# Altium PCB MB1183.PcbDoc
Units mm, origin at the board's own origin, x right, y up, seen from the top; angles counter-clockwise.
Board outline 22.5 x 40 mm, 2 copper layers (Top Layer, Bottom Layer), stack 1.571 mm thick; 27 components, 28 nets, 135 pads, 68 vias.
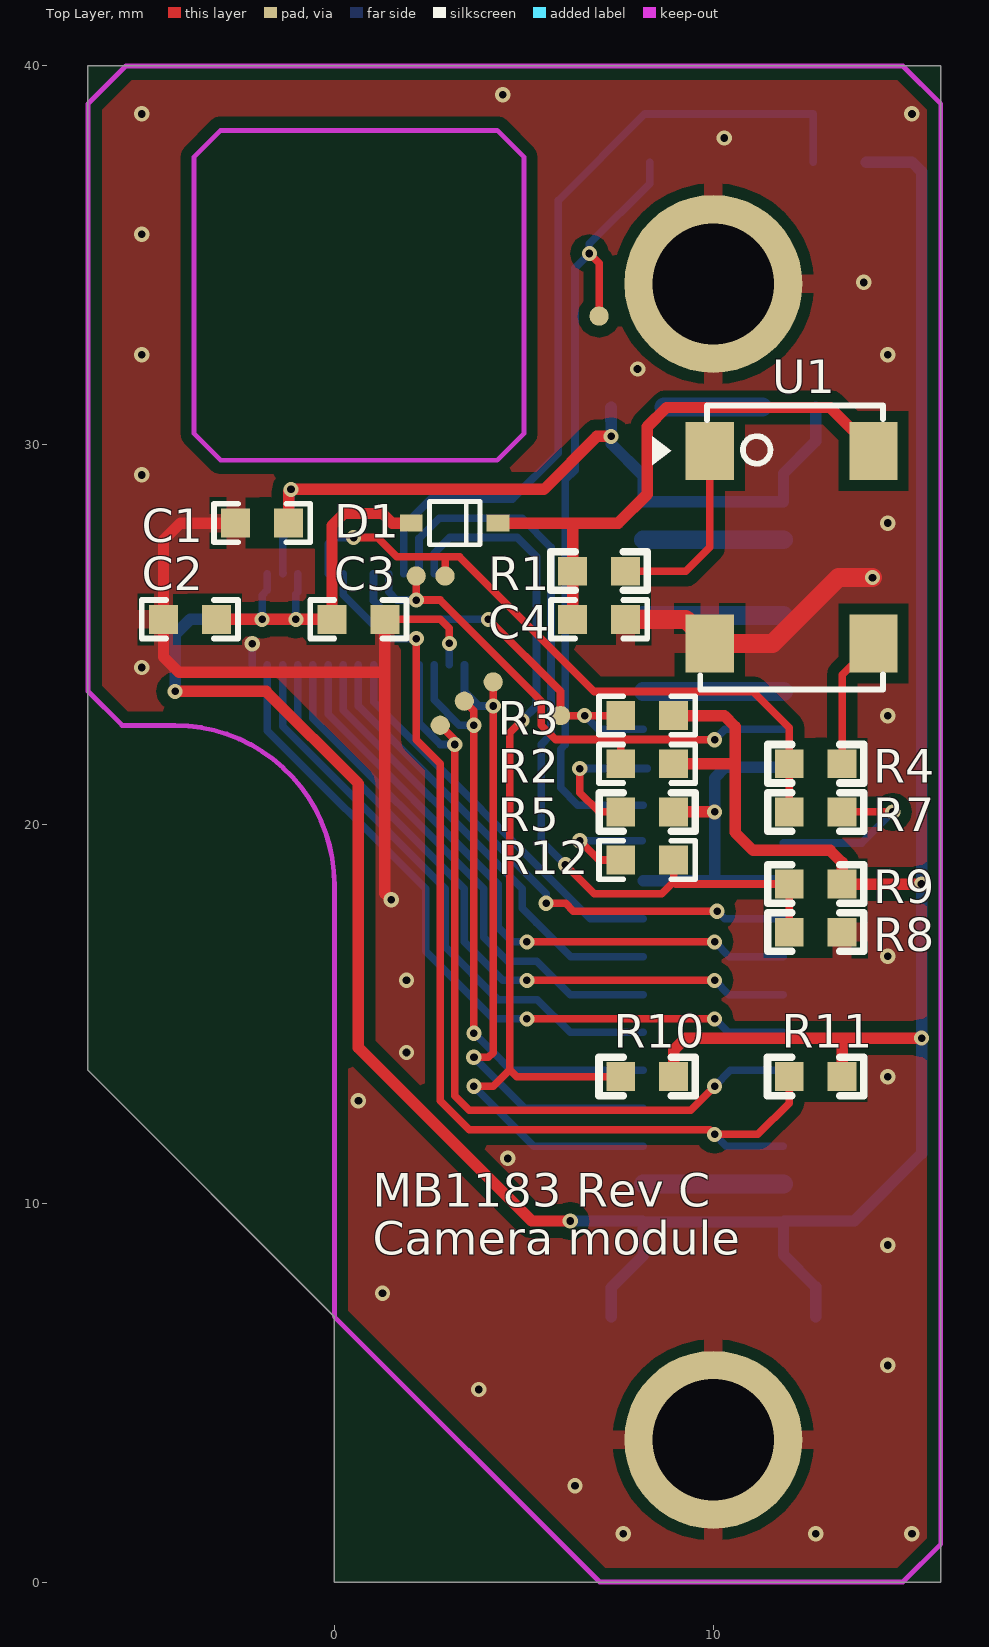
[diagram p0: Top Layer view]
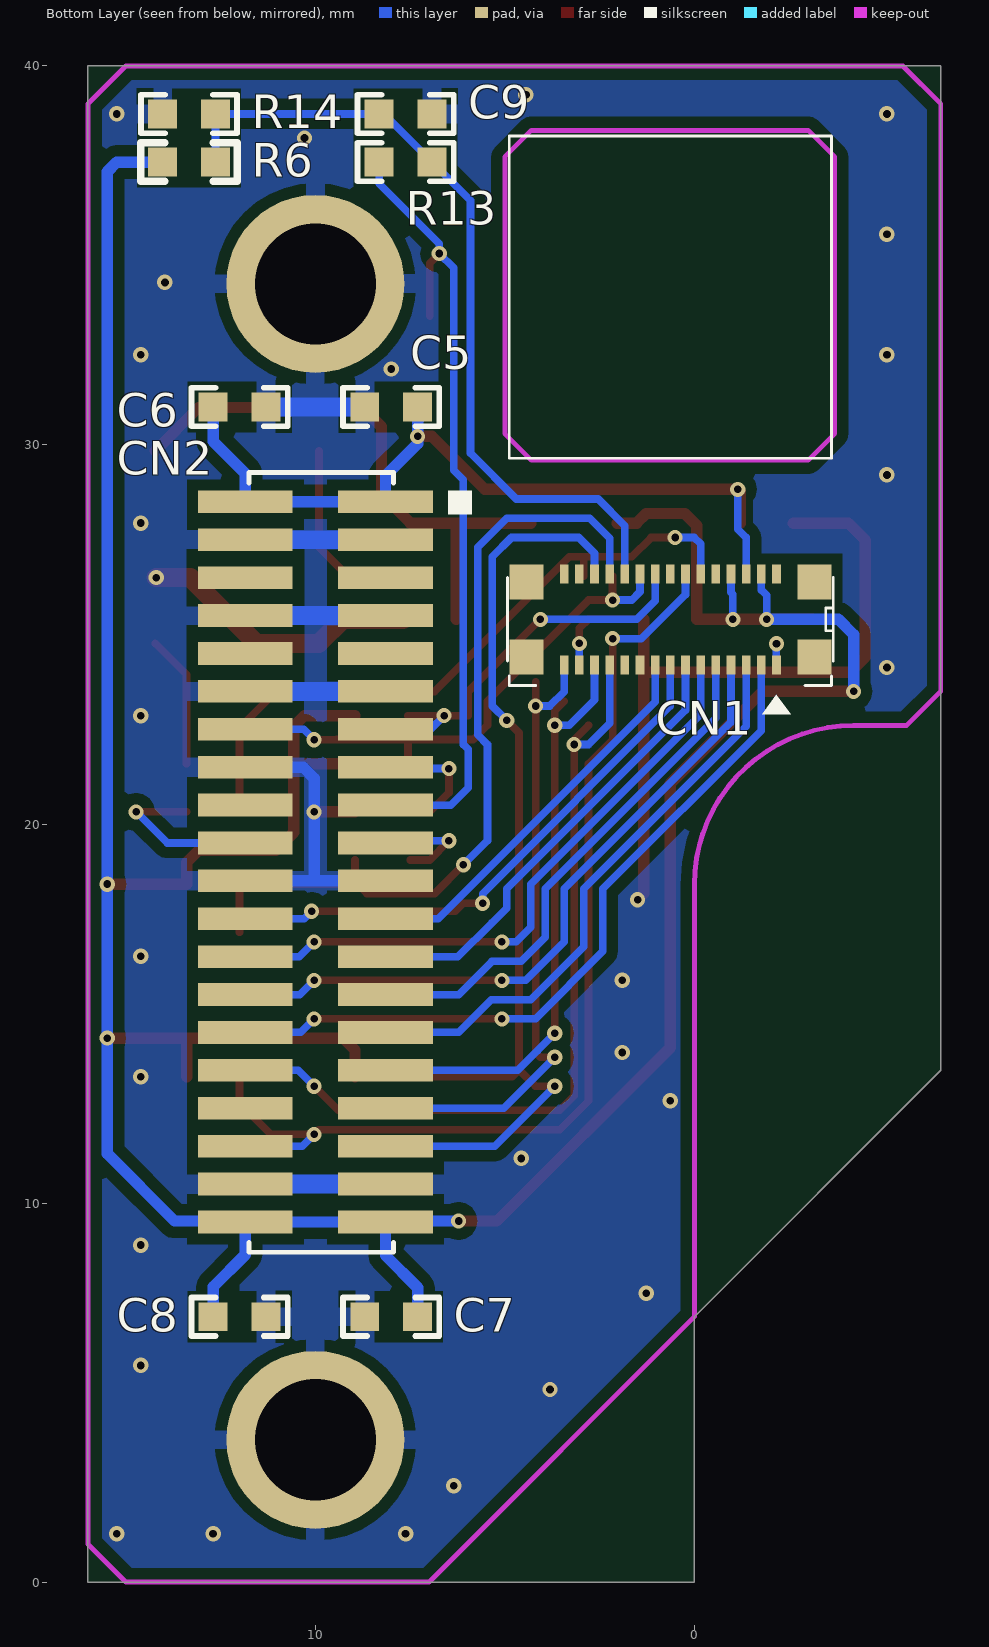
[diagram p1: Bottom Layer view, seen from below]

## Layer stack, top to bottom
Top Layer: signal copper 0.0356
Dielectric: core 1.5, FR-4, Dk 4.8
Bottom Layer: signal copper 0.0356

## Board outline
0,0 16,0 16,40 -6.5,40 -6.5,13.5 0,7 0,0

## Design rules (kind name [scope] priority, off if disabled: settings)
Clearance Clearance_1 [(InPoly)] p1: gap=0.3
Clearance [All] p2: gap=0.15
ComponentClearance [All] p1: gap=0.254 collisioncheckmode=3 verticalgap=0.254
HoleSize [All] p1: absolutevalues=TRUE maxlimit=3.81 minlimit=0.025 maxpercent=80.000 minpercent=20.000
PlaneClearance [All] p1: clearance=0.5
PolygonConnect PolygonConnect_2 [(InComponent('CN1'))] p1: connectstyle=NoConnect reliefconductorwidth=0.254 reliefentries=2 polygonreliefangle="90 Angle"
PolygonConnect PolygonConnect_1 [IsVia] p2: connectstyle=Direct reliefconductorwidth=0.508 reliefentries=4 polygonreliefangle="90 Angle"
PolygonConnect [All] p3: connectstyle=Relief reliefconductorwidth=0.5 reliefentries=4 polygonreliefangle="90 Angle"
RoutingLayers [All] p1: top layer_v5=FALSE bottom layer_v5=FALSE
RoutingVias [All] p1: holewidth=0.3 width=0.6 viastyle="Through Hole" minholewidth=0.2 minwidth=0.4 maxholewidth=0.7 maxwidth=1.3
SolderMaskExpansion [All] p1: expansion=0.102
TestPointUsage [All] p1: valid=0 allowmultiple=FALSE
Testpoint [(IsPad And (OnTopLayer Or OnBottomLayer))] p1: side=3 testpointundercomponent=TRUE minsize=1.016 maxsize=2.54 preferedsize=1.524 minholesize=0 maxholesize=1.016 preferedholesize=0.813 testpointgrid=0.025 style=297 order=0-112345678
Width [All] p1: maxlimit=2.54 minlimit=0.15 preferedwidth=0.254 toplayer_maxwidth=2.5 toplayer_prefwidth=0.2 bottomlayer_maxwidth=2.5 bottomlayer_prefwidth=0.2 minimp=50.000000 maximp=50.000000 favimp=50.000000
15 further rules are at their usual default settings.

## Classes and differential pairs
net class PAR_D[0..7]: PAR_D0 PAR_D1 PAR_D2 PAR_D3 PAR_D4 PAR_D5 PAR_D6 PAR_D7

## Components (designator, comment, footprint, x,y, rotation, side; value= is the part's Value field where it differs from the comment)
C1 "100nF" 0603C -1.905,27.94 r0 top (schematic designator C4)
C2 "100nF" 0603C -3.81,25.4 r0 top (schematic designator C3)
C3 "100nF" 0603C 0.635,25.4 r180 top (schematic designator C5)
C4 "100nF" 0603C 6.985,25.4 r180 top (schematic designator C8)
C5 "100nF" 0603C 8,31 r0 bottom (schematic designator C1)
C6 "100nF" 0603C 12,31 r0 bottom (schematic designator C2)
C7 "100nF" 0603C 12,7 r0 bottom
C8 "100nF" 0603C 8,7 r180 bottom (schematic designator C6)
C9 "[N/A]" 0603C 7.62,38.735 r0 bottom
CN1 "AXE530124" AXE530124 0.635,25.4 r0 bottom (schematic designator CN2)
CN2 "FTMH-120-03-L-DV-ES" FTMH-120-03-L-DV-ES 10,19 r270 bottom locked (schematic designator CN1)
D1 "BAT60JFILM" SOD-323 3.175,27.94 r180 top
R1 "10K" 0603R 6.985,26.67 r180 top (schematic designator R7)
R2 "[N/A]" 0603R 8.255,21.59 r0 top (schematic designator R8)
R3 "[N/A]" 0603R 8.255,22.86 r0 top (schematic designator R9)
R4 "0" 0603R 12.7,21.59 r0 top (schematic designator R6)
R5 "0" 0603R 8.255,20.32 r180 top (schematic designator R3)
R6 "[N/A]" 0603R 13.335,37.465 r0 bottom (schematic designator R2)
R7 "[N/A]" 0603R 12.7,20.32 r0 top (schematic designator R5)
R8 "[N/A]" 0603R 12.7,17.145 r0 top (schematic designator R4)
R9 "22K" 0603R 12.7,18.415 r0 top (schematic designator R1)
R10 "[N/A]" 0603R 8.255,13.335 r0 top
R11 "[N/A]" 0603R 12.7,13.335 r0 top
R12 "0" 0603R 8.255,19.05 r0 top
R13 "2K" 0603R 7.62,37.465 r0 bottom
R14 "10K" 0603R 13.335,38.735 r180 bottom
U1 "SM7745HEW-24.0M" XTAL_5X7 12.065,27.305 r270 top

## Footprints (in the part's own frame and the unit in brackets; to place one, negate y for a bottom-side part, rotate by r counter-clockwise, add the part's x,y. Pads: shape width x height; smd on the part's side, far side on the other; paste and mask are expansions set on the pad)
0603C [mil]
  rect 30x30 smd: 1(27.5,0) 2(-27.5,0)
  silkscreen extent -50,-20 50,20
0603R [mil]
  rect 30x30 smd: 1(27.5,0) 2(-27.5,0)
  silkscreen extent -50,-20 50,20
AXE530124 [mm]
  rect 0.9x0.92 smd: 0(-3.8,-0.99) 0(-3.8,0.99) 0(3.8,-0.99) 0(3.8,0.99)
  rect 0.23x0.5 smd: 1(-2.8,1.2) 2(-2.8,-1.2) 3(-2.4,1.2) 4(-2.4,-1.2) 5(-2,1.2) 6(-2,-1.2) 7(-1.6,1.2) 8(-1.6,-1.2) 9(-1.2,1.2) 10(-1.2,-1.2) 11(-0.8,1.2) 12(-0.8,-1.2) 13(-0.4,1.2) 14(-0.4,-1.2) 15(0,1.2) 16(0,-1.2) 17(0.4,1.2) 18(0.4,-1.2) 19(0.8,1.2) 20(0.8,-1.2) 21(1.2,1.2) 22(1.2,-1.2) 23(1.6,1.2) 24(1.6,-1.2) 25(2,1.2) 26(2,-1.2) 27(2.4,1.2) 28(2.4,-1.2) 29(2.8,1.2) 30(2.8,-1.2)
  silkscreen extent -4.3,-12.75 4.3,2.5
FTMH-120-03-L-DV-ES [mm]
  rect 0.6x2.5 smd: 1(-9.5,1.85) 2(-9.5,-1.85) 3(-8.5,1.85) 4(-8.5,-1.85) 5(-7.5,1.85) 6(-7.5,-1.85) 7(-6.5,1.85) 8(-6.5,-1.85) 9(-5.5,1.85) 10(-5.5,-1.85) 11(-4.5,1.85) 12(-4.5,-1.85) 13(-3.5,1.85) 14(-3.5,-1.85) 15(-2.5,1.85) 16(-2.5,-1.85) 17(-1.5,1.85) 18(-1.5,-1.85) 19(-0.5,1.85) 20(-0.5,-1.85) 21(0.5,1.85) 22(0.5,-1.85) 23(1.5,1.85) 24(1.5,-1.85) 25(2.5,1.85) 26(2.5,-1.85) 27(3.5,1.85) 28(3.5,-1.85) 29(4.5,1.85) 30(4.5,-1.85) 31(5.5,1.85) 32(5.5,-1.85) 33(6.5,1.85) 34(6.5,-1.85) 35(7.5,1.85) 36(7.5,-1.85) 37(8.5,1.85) 38(8.5,-1.85) 39(9.5,1.85) 40(9.5,-1.85)
  silkscreen extent -10.28,-1.75 10.3,4.14
SOD-323 [mm]
  rect 0.6x0.45 smd: 1(1.143,0) 2(-1.143,0)
  silkscreen extent -0.67,-0.57 0.67,0.57
XTAL_5X7 [mil]
  rect 60x50 smd: 1(-100,-85) 2(100,-85) 3(100,85) 4(-100,85)
  silkscreen extent -147,-145 148,95

## Part data
C1 C2 C3 C4 C5 C6 C7 C8 C9: library part Cap, "Capacitor"
CN1: library part U866_3M_FF, "CAMERA MODULE"
CN2: library part "Header 20X2", "20*2Pins, 1mm_SMT, male"
D1: library part Diode, "Default Diode"
R1 R3 R4 R5 R6 R7 R8 R9 R10 R11 R12 R13 R14: library part Res1, "Resistor"
R2: library part Res1, "Resistor 10K"
U1: library part SM7745HEV-50.0M

## Free pads (board coordinates)
  round 0.508 smd: 0(2.159,26.543) 0(2.794,22.606) 0(2.921,26.543) 0(3.429,23.241) 0(4.191,23.749) 0(5.969,22.86) 0(6.985,33.401)
  round 4.7 hole 3.2: 0(10,3.75) 0(10,34.25)

## Via types
v1: diameter 0.4, hole 0.2, Top Layer to Bottom Layer, tented both sides, 38 vias
v2: diameter 0.406, hole 0.203, Top Layer to Bottom Layer, tented both sides, 30 vias

## Nets (pads, with @x,y where several pads share a name; then routed paths per layer and width w, separated by ;. In a path a pad name is that pad's centre, name@x,y a point inside that pad or via, vN(x,y) a via of type N, cw(c..) or ccw(c..) an arc to the next point about the centre after c; other vN are vias at no path point)
+1V8: C1.1 C5.2 C6.1 CN1.6 CN2.1 CN2.2 | length 22.5
  Top Layer w0.3: C1.1 -1.207,28.765 v1(-1.143,28.829) 5.529,28.829 6.926,30.226 v1(7.302,30.226)
  Bottom Layer w0.2: CN1.6@-1.35,26.615 CN1.6 -1.365,27.559 -1.143,27.781 v1(-1.143,28.829)
  Bottom Layer w0.3: v1(7.302,30.226) 7.289,30.988 C5.2 7.302,30.036 8.15,29.188 CN2.1 CN2.2 11.85,29.249 12.699,30.098 C6.1
+2V8: C2.1 C3.1 C7.1 C8.1 CN1.4 CN1.8 CN2.39 CN2.40 D1.1 R2.1 R3.1 R6.1 R9.1 R10.1 R11.1 | length 98.3
  Top Layer w0.3: v1(-4.2,23.5) -1.8,23.5 0.635,21.065 0.635,14.097 5.207,9.525 v1(6.223,9.525) ; C2.1 v1(-1.905,25.4) ; v1@-2.032,25.4 v1(-1.905,25.4) ; D1.1 1.524,27.94 1.27,28.194 0.254,28.194 -0.063,27.877 -0.063,25.4 v1(-1.016,25.4) v1(-1.905,25.4) ; R10.1 8.954,14.034 9.271,14.351 v1(15.494,14.351) ; R2.1 10.484,21.59 10.573,21.5 ; R3.1 10.287,22.86 10.573,22.574 10.573,19.78 11.049,19.304 13.081,19.304 13.398,18.987 R9.1 v2(15.494,18.415) ; 13.335,14.351 13.399,14.287 R11.1
  Bottom Layer w0.2: v1(-1.905,25.4) -1.905,26.035 -1.765,26.175 CN1.4 ; v1(-1.016,25.4) -1.016,26.061 -0.965,26.112 CN1.8
  Bottom Layer w0.3: v1(-4.2,23.5) -4.2,25 -3.8,25.4 v1(-1.905,25.4) ; v1(6.223,9.525) 8.125,9.525 CN2.39 ; C8.1 7.302,7.765 8.15,8.614 CN2.39 ; C7.1 12.699,7.787 11.85,8.636 CN2.40 ; R6.1 15.24,37.465 15.494,37.211 15.494,11.303 13.716,9.525 11.875,9.525 CN2.40 ; CN2.39 CN2.40
CAMERA_CLK: CN1.12 pad.0@2.921,26.543 R4.2 R7.2 | length 17.8
  Top Layer w0.2: v1(0.508,27.559) 1.144,27.559 1.652,27.052 2.921,27.052 ; pad.0@2.921,26.543 2.921,27.052 ; R7.2 R4.2 12.002,22.542 11.049,23.495 6.858,23.495 3.301,27.052 2.921,27.052
  Bottom Layer w0.2: CN1.12 -0.165,27.393 0.001,27.559 v1(0.508,27.559)
CAMERA_RST: CN2.17 pad.0@6.985,33.401 R13.1 | length 21.6
  Top Layer w0.2: v1(6.731,35.052) 6.985,34.798 pad.0@6.985,33.401
  Bottom Layer w0.2: CN2.17 6.424,20.5 5.969,20.955 5.969,21.971 6.096,22.098 6.096,29.083 6.35,29.337 6.35,34.671 v1(6.731,35.052) 6.731,35.306 8.319,36.893 R13.1
CAMERA_RST_S5K: C9.1 CN1.22 R6.2 R13.2 R14.1 | length 21.7
  Bottom Layer w0.203: CN1.22 1.835,27.87 2.54,28.575 4.699,28.575 5.905,29.781 5.905,36.449 8.191,38.735 R14.1 R6.2
EXTCLK: CN2.20 R7.1 | length 4.6
  Top Layer w0.203: R7.1 v1(14.732,20.32)
  Bottom Layer w0.203: CN2.20 13.912,19.5 v1(14.732,20.32)
FLASH: CN1.14 CN2.36 R11.2 | length 28
  Top Layer w0.2: v1(2.159,24.892) 2.159,22.225 2.794,21.59 2.794,12.7 3.556,11.938 9.906,11.938 v1(10.033,11.811) 11.176,11.811 12.002,12.636 R11.2
  Bottom Layer w0.2: CN1.14 0.235,26.054 1.397,24.892 v1(2.159,24.892) ; v1(10.033,11.811) 10.344,11.5 CN2.36
GND: C1.2 C2.2 C3.2 C4.2 C5.1 C6.2 C7.2 C8.2 C9.2 CN1.1 CN1.27 CN2.3 CN2.4 CN2.7 CN2.8 CN2.11 CN2.12 CN2.16 CN2.21 CN2.22 CN2.37 CN2.38 pad.0@10,3.75 pad.0@10,34.25 R5.2 R8.1 R14.2 U1.2 | length 56.3
  Top Layer w0.2: C3.2@1.334,25.4 2.794,25.4 3.035,25.159 v1(3.035,24.765)
  Top Layer w0.3: C1.2 -4.06,27.94 -4.508,27.492 C2.2 -4.508,24.408 -4.1,24 1.334,24 ; C3.2@1.334,25.4 1.334,24 ; v1(1.5,18) 1.334,18.166 1.334,24 ; R5.2 v1(10.033,20.32)
  Top Layer w0.5: C4.2 9.271,25.4 U1.2 11.565,24.765 13.3,26.5 v1(14.2,26.5)
  Bottom Layer w0.2: CN1.1 v2(-2.165,24.759) ; CN1.27 v1(3.035,24.765)
  Bottom Layer w0.3: CN2.21 CN2.22 ; 10.033,18.5 10.033,21.209 10.324,21.5 CN2.16
  Bottom Layer w0.5: CN2.37 CN2.38 ; CN2.11 CN2.12 ; CN2.7 CN2.8 ; CN2.3 CN2.4 ; C5.1 C6.2
  other v2: 7.62,1.27 12.7,1.27 15.24,1.27 6.35,2.54 3.81,5.08 14.605,5.715 1.27,7.62 14.605,8.89 4.572,11.176 0.635,12.7 14.605,13.335 1.905,13.97 1.905,15.875 14.605,16.51 14.605,22.86 -5.08,24.13 14.605,27.94 -5.08,29.21 8.001,32.004 -5.08,32.385 14.605,32.385 13.97,34.29 -5.08,35.56 10.287,38.1 -5.08,38.735 15.24,38.735 4.445,39.243
NetC4_1: C4.1 D1.2 R1.1 U1.4 | length 15.2
  Top Layer w0.3: D1.2 7.493,27.94 8.255,28.702 8.255,30.48 8.763,30.988 13.081,30.988 U1.4 ; C4.1 6.286,27.94
NetCN2_15: CN2.15 R5.1 | length 3.7
  Top Layer w0.203: v1(6.477,21.463) 6.477,20.828 6.985,20.32 R5.1
  Bottom Layer w0.203: v1(6.477,21.463) CN2.15@8.255,21.463
NetCN2_19: CN2.19 R12.2 | length 2.9
  Top Layer w0.2: v1(6.477,19.558) 6.985,19.05 R12.2@7.493,19.05
  Bottom Layer w0.2: v1(6.477,19.558) CN2.19@8.128,19.558
NetR1_2: R1.2 U1.1 | length 5.9
  Top Layer w0.203: R1.2 9.271,26.67 9.906,27.305 9.906,29.019 ; 9.906,28.194 9.906,29.02 ; U1.1 9.906,29.02
NetR4_1: R4.1 U1.3 | length 3.5
  Top Layer w0.203: R4.1 13.399,23.94 U1.3
PAR_D0: CN1.17 CN2.23 | length 10.5
  Bottom Layer w0.2: CN1.17 1.035,23.222 6.757,17.5 CN2.23
PAR_D1: CN1.15 CN2.24 | length 14.8
  Top Layer w0.2: v1(5.588,17.907) 6.1,17.907 6.307,17.7 v1(10.1,17.7)
  Bottom Layer w0.2: CN1.15 0.635,23.114 5.588,18.161 v1(5.588,17.907) ; v1(10.1,17.7) 10.3,17.5 CN2.24
PAR_D2: CN1.13 CN2.25 | length 12.1
  Bottom Layer w0.2: CN1.13 0.235,23.006 4.953,18.288 4.953,17.78 5.334,17.399 5.34,17.399 6.239,16.5 CN2.25
PAR_D3: CN1.11 CN2.26 | length 16.6
  Top Layer w0.2: v1(5.08,16.891) v1(10.033,16.891)
  Bottom Layer w0.2: CN1.11 -0.165,22.898 4.318,18.415 4.318,17.272 4.699,16.891 v1(5.08,16.891) ; v1(10.033,16.891) 10.424,16.5 CN2.26
PAR_D4: CN1.9 CN2.27 | length 13.9
  Bottom Layer w0.2: CN1.9 -0.565,22.79 3.937,18.288 3.937,17.018 4.572,16.383 5.34,16.383 6.223,15.5 CN2.27
PAR_D5: CN1.7 CN2.28 | length 18.1
  Top Layer w0.2: v1(5.08,15.875) v1(10.033,15.875)
  Bottom Layer w0.2: CN1.7 -0.965,22.682 3.429,18.288 3.429,16.891 4.445,15.875 v1(5.08,15.875) ; v1(10.033,15.875) 10.408,15.5 CN2.28
PAR_D6: CN1.5 CN2.29 | length 15.4
  Bottom Layer w0.2: CN1.5 -1.365,22.574 2.921,18.288 2.921,16.764 4.318,15.367 5.356,15.367 6.223,14.5 CN2.29
PAR_D7: CN1.3 CN2.30 | length 19.6
  Top Layer w0.2: v1(5.08,14.859) v1(10.033,14.859)
  Bottom Layer w0.2: CN1.3 -1.765,22.466 2.413,18.288 2.413,16.637 4.191,14.859 v1(5.08,14.859) ; v1(10.033,14.859) 10.392,14.5 CN2.30
PAR_HSYNC: CN1.25 CN2.31 pad.0@3.429,23.241 | length 16
  Top Layer w0.2: pad.0@3.429,23.241 3.683,22.987 v1(3.683,22.606) v1(3.683,14.478)
  Bottom Layer w0.2: CN1.25 2.635,23.273 3.302,22.606 v1(3.683,22.606) ; v1(3.683,14.478) 3.689,14.478 4.136,14.031 4.136,14.025 4.661,13.5 CN2.31
PAR_PCLK: CN1.29 CN2.33 pad.0@4.191,23.749 | length 17
  Top Layer w0.2: v2(3.683,13.843) 4.064,13.843 4.191,13.97 v1(4.191,23.114) pad.0@4.191,23.749
  Bottom Layer w0.2: CN1.29 3.435,23.495 3.816,23.114 v1(4.191,23.114) ; v2(3.683,13.843) 5.026,12.5 CN2.33
PAR_VSYNC: CN1.23 CN2.32 pad.0@2.794,22.606 | length 21.9
  Top Layer w0.2: pad.0@2.794,22.606 3.175,22.225 v1(3.175,22.098) 3.175,12.827 3.556,12.446 9.398,12.446 v1(10.033,13.081)
  Bottom Layer w0.2: CN1.23 2.235,22.657 2.794,22.098 v1(3.175,22.098) ; v1(10.033,13.081) 10.452,13.5 CN2.32
SCL: CN1.18 CN2.13 pad.0@5.969,22.86 R3.2 | length 10.6
  Top Layer w0.203: v1(4.064,25.4) 5.969,23.495 5.969,22.86 v1(6.604,22.86) R3.2
  Bottom Layer w0.203: CN1.18 1.035,25.889 1.524,25.4 v1(4.064,25.4) ; v1(6.604,22.86) 6.964,22.5 CN2.13
SDA: CN1.20 CN2.14 pad.0@2.159,26.543 R2.2 | length 14.3
  Top Layer w0.203: pad.0@2.159,26.543 v1(2.159,25.908) 2.794,25.908 5.461,23.241 5.461,22.606 5.84,22.227 9.439,22.227 9.441,22.225 v1(10.033,22.225) ; 7.495,22.227 7.493,22.225 7.556,22.162 R2.2
  Bottom Layer w0.203: CN1.20 1.435,26.124 1.651,25.908 v1(2.159,25.908) ; v1(10.033,22.225) 10.308,22.5 CN2.14
SHUTTER: CN1.26 CN2.35 R10.2 | length 26.7
  Top Layer w0.203: v1(3.683,13.081) 4.191,13.081 4.628,13.518 ; v1(4.953,22.733) 4.628,22.408 4.628,13.518 ; R10.2 4.812,13.335 4.628,13.518
  Bottom Layer w0.203: CN1.26 2.635,27.146 3.048,27.559 4.826,27.559 5.334,27.051 5.334,23.114 v1(4.953,22.733) ; v1(3.683,13.081) 5.264,11.5 CN2.35
STANDBY: CN1.24 R8.2 R9.2 R12.1 | length 21.9
  Top Layer w0.203: v1(6.096,18.923) 6.858,18.161 8.636,18.161 8.954,18.479 ; R12.1 8.954,18.479 ; R8.2 R9.2 9.017,18.415 8.954,18.479
  Bottom Layer w0.203: CN1.24 2.235,27.537 2.765,28.067 4.953,28.067 5.715,27.305 5.715,22.352 5.461,22.098 5.461,19.558 v1(6.096,18.923)
pads on no net: CN1.0 CN1.2 CN1.10 CN1.16 CN1.19 CN1.21 CN1.28 CN1.30 CN2.5 CN2.6 CN2.9 CN2.10 CN2.18 CN2.34

## Polygon pours and split planes (outlines as drawn)
GND on Top Layer "Top Layer-No Net 1" (solid, remove dead copper, pour order 3): -5.867,40.816 -5.167,40.116 17.033,40.116 17.033,-0.984 17.833,-1.784 16.533,-0.484 -7.067,-0.484 -7.067,20.016 -8.667,21.616 -7.867,22.416 -7.867,40.716 -5.967,40.716
GND on Bottom Layer "Top Layer-No Net 1" (solid, remove dead copper, pour order 8): -7.977,40.878 -7.977,1.46 -4.777,-1.922 -4.477,-1.605 17.723,-1.605 17.723,40.35 18.123,40.772

## Keep-outs
Keep-Out Layer:
  lines w0.127: -6.5,23.5 -5.6,22.6 -4.2,22.6 cw(c-4.2,18.4) 0,18.4 0,7 7,0 15,0 16,1 16,39 15,40 1,40 -5.5,40 -6.5,39 -6.5,23.5 ; -3.7,30.3 -3.7,37.6 -3,38.3 4.3,38.3 5,37.6 5,30.3 4.3,29.6 -3,29.6 -3.7,30.3

## Silkscreen, mask and mechanical layers (free items; w line width, h text height)
Top Overlay:
  text "MB1183 Rev C" at 1.016,9.906 h0.89
  text "Camera module" at 1.016,8.636 h0.89
Mechanical 1:
  lines w0.127: 0,9 0,7 ; 0,7 0,18.4 ccw(c-4.2,18.4) -4.2,22.6 -5.6,22.6 -6.5,23.5 -6.5,39 -5.5,40 1,40 15,40 16,39 16,1 15,0 7,0 0,7 ; -3.7,30.3 -3,29.6 4.3,29.6 5,30.3 5,37.6 4.3,38.3 -3,38.3 -3.7,37.6 -3.7,30.3
  text "MB1183" at -5.715,40.64 h1.52
Drill Drawing:
  lines w0.051: 26.024,9.359 53.476,9.359 ; 26.024,10.347 53.476,10.347 ; 24.5,3.33 ccw(c24.83,3.33) 24.83,3 54.67,3 ccw(c54.67,3.33) 55,3.33 55,12.17 ccw(c54.67,12.17) 54.67,12.5 24.83,12.5 ccw(c24.83,12.17) 24.5,12.17 24.5,3.33
  text ".legend" at 19.5,39 h0.89
  text "Layer Stack Up Detail for: MB1183.PcbDoc" at 26.024,10.92 h0.66
  text "Layer" at 26.024,9.978 h0.23
  text "Gerber" at 32.02,9.978 h0.23
  text "Copper" at 34.791,9.978 h0.23
  text "Dielectric" at 37.936,9.978 h0.23
  text "Dielectric" at 41.24,9.978 h0.23
  text "Dielectric" at 45.585,9.978 h0.23
  text "Dielectric" at 48.89,9.978 h0.23
  text "Name" at 26.024,9.521 h0.23
  text "Document" at 32.02,9.521 h0.23
  text "Thickness" at 34.791,9.521 h0.23
  text "Height" at 37.936,9.521 h0.23
  text "Material" at 41.24,9.521 h0.23
  text "Constant" at 45.585,9.521 h0.23
  text "Type" at 48.89,9.521 h0.23
  text "Top Solder Mask" at 26.024,8.74 h0.33
  text "(.GTS)" at 32.02,8.74 h0.33
  text "0.4mil" at 37.936,8.74 h0.33
  text "Solder Resist" at 41.24,8.74 h0.33
  text "3.50" at 45.585,8.74 h0.33
  text "Top Layer" at 26.024,7.552 h0.33
  text "(.GTL)" at 32.02,7.552 h0.33
  text "1.4mil" at 34.791,7.552 h0.33
  text "59.055mil" at 37.936,6.958 h0.33
  text "FR-4" at 41.24,6.958 h0.33
  text "4.80" at 45.585,6.958 h0.33
  text "Core" at 48.89,6.958 h0.33
  text "Bottom Layer" at 26.024,6.365 h0.33
  text "(.GBL)" at 32.02,6.365 h0.33
  text "1.4mil" at 34.791,6.365 h0.33
  text "Bottom Solder Mask" at 26.024,5.177 h0.33
  text "(.GBS)" at 32.02,5.177 h0.33
  text "0.4mil" at 37.936,5.177 h0.33
  text "Solder Resist" at 41.24,5.177 h0.33
  text "3.50" at 45.585,5.177 h0.33